# Altium PCB LEO_COTS.PcbDoc
Units mil, origin at the board's own origin, x right, y up, seen from the top; angles counter-clockwise.
Board outline 1417.32 x 393.7 mil, 2 copper layers (Top Layer, Bottom Layer), stack 14.8 mil thick; 19 components, 18 nets, 99 pads, 14 vias.
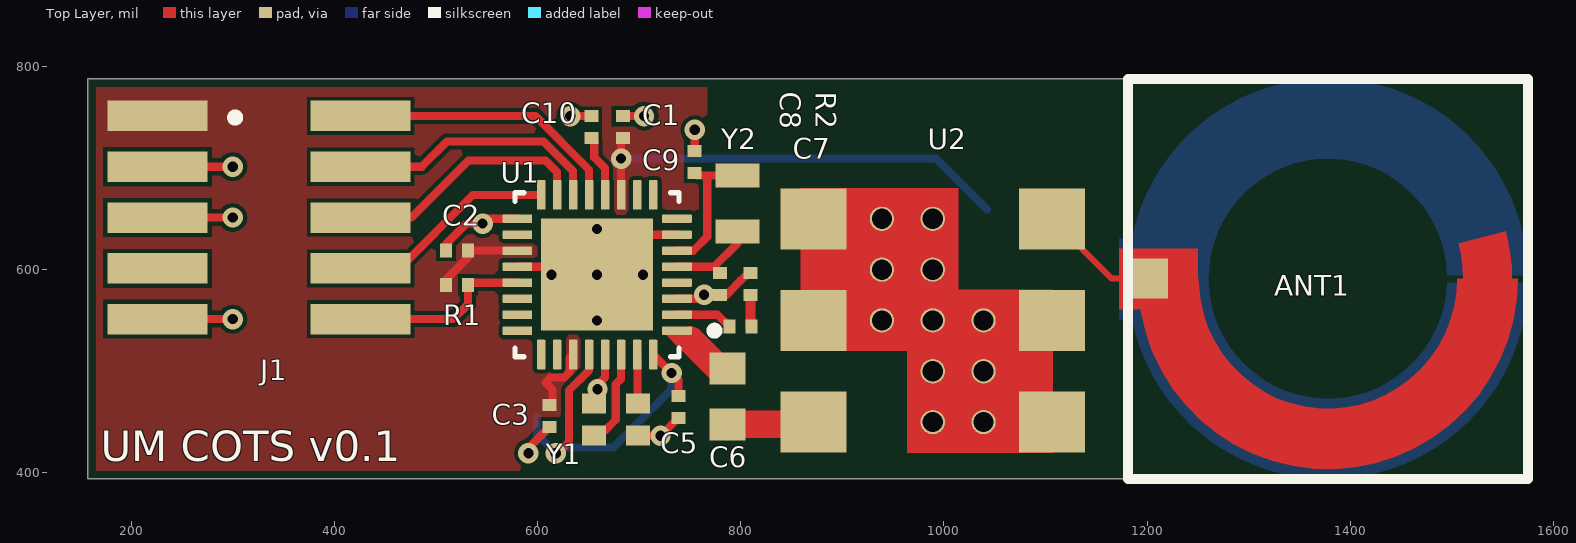
[diagram p0: Top Layer view]
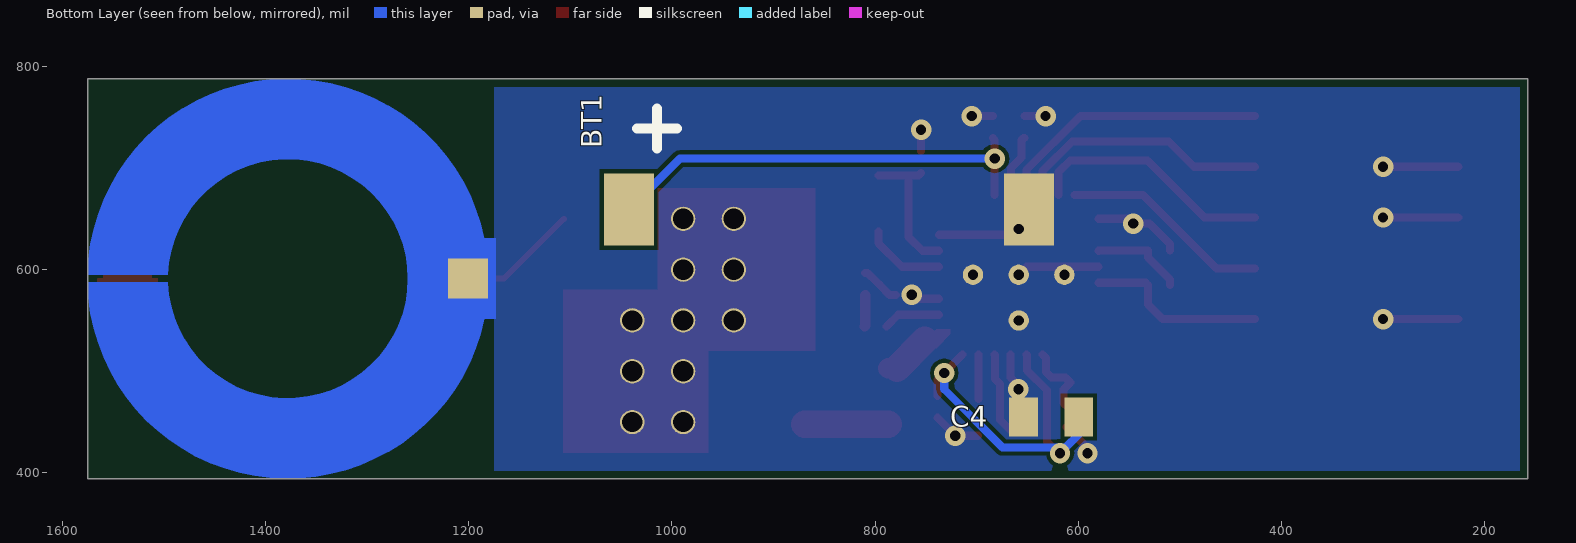
[diagram p1: Bottom Layer view, seen from below]
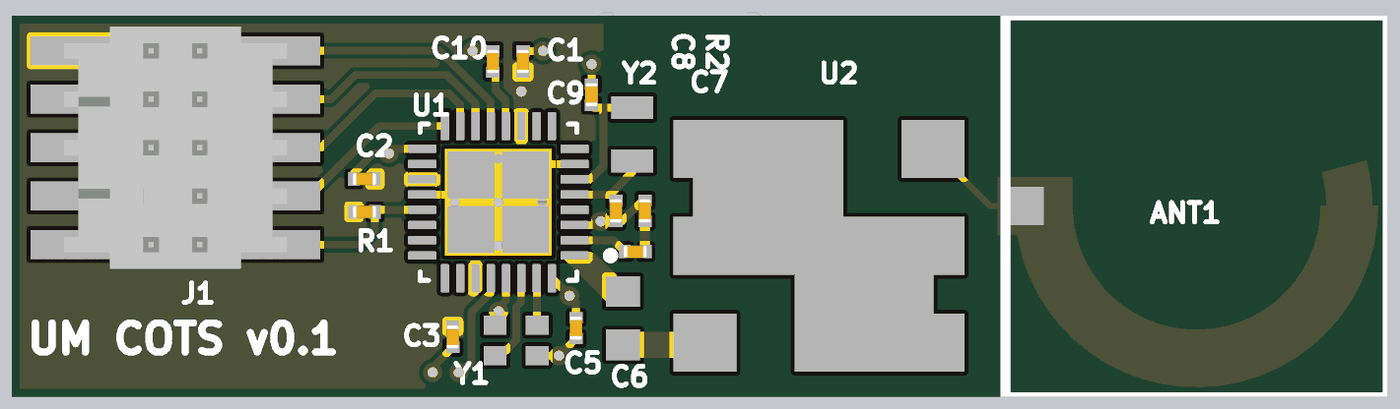
[diagram p2: 3D render of the assembled board from above, using the file's embedded part models]

## Layer stack, top to bottom
Top Solder: solder mask 0.4, Solder Resist, Dk 3.5
Top Layer: signal copper 1.4
Dielectric 1: core 12, RO4003C-012, Dk 3.55
Bottom Layer: signal copper 1.4
Bottom Solder: solder mask 0.4, Solder Resist, Dk 3.5

## Board outline
157.48,393.7 1574.8,393.7 1574.8,787.4 157.48,787.4

## Design rules (kind name [scope] priority, off if disabled: settings)
BoardOutlineClearance BoardOutlineClearance_1 [All] p1: gap=8 ignorepadtopadclearanceinfootprint=FALSE
Clearance [All] p1: gap=4 ignorepadtopadclearanceinfootprint=FALSE
HoleSize [All] p1: absolutevalues=TRUE maxlimit=100 minlimit=8 maxpercent=80.000 minpercent=20.000
MinimumAnnularRing [All] p1: minimumring=8
PlaneConnect [All] p1: planeconnectstyle=Direct reliefexpansion=20 reliefentries=4 reliefconductorwidth=10 reliefairgap=10
PolygonConnect [All] p1: connectstyle=Direct reliefconductorwidth=10 reliefentries=4 polygonreliefangle="90 Angle" airgapwidth=10
RoutingVias [All] p1: holewidth=10 width=20 viastyle="Through Hole" minholewidth=8 minwidth=16 maxholewidth=90 maxwidth=100
SolderMaskExpansion [All] p1: expansion=4
Width [All] p1: maxlimit=100 minlimit=4 preferedwidth=4
28 further rules are at their usual default settings.

## Components (designator, comment, footprint, x,y, rotation, side; value= is the part's Value field where it differs from the comment)
ANT1 "ANT" RESLOOP_OD10_fw15_fl180_sw12_sl15 1377.95,590.83 r180 top
BT1 "BATT" 1318164-1 845.46,658.92 r90 bottom
C1 "CAP_0201" CAPC0603X04N 684,740 r270 top value=100nF
C2 "CAP_0201" CAPC0603X04N 520.7,618.7 r0 top value=100nF
C3 "CAP_0201" CAPC0603X04N 611.7,455.7 r90 top value=100nF
C4 "CAP_0603" CAPC1608X05N 626.7,454.7 r0 bottom value=10uF
C5 "CAP_0201" CAPC0603X04N 738.7,464.7 r90 top value=100nF
C6 "CAP" 1608[0603] 787,475 r270 top value=12pF
C7 "CAP_0201" CAPC0603X04N 799.7,543.7 r180 top value=12pF
C8 "CAP_0201" CAPC0603X04N 779.7,585.7 r90 top value=12pF
C9 "CAP_0201" CAPC0603X04N 754.7,705.7 r270 top value=12pF
C10 "CAP_0201" CAPC0603X04N 653,740 r270 top value=1uF
J1 "10-Pin JTAG" FTSH-105-01-F-DV-007-K 326,651 r0 top
R1 "Res Semi" CAPC0603X04N 520.7,584.7 r180 top value=1K
R2 "Res Semi" CAPC0603X04N 809.7,585.7 r270 top value=50
U1 "CC1350F128RSMR" QFN40P400X400X100-33N 658.7,594.7 r180 top
U2 "RMK-3-332+" RMK-3-331+ 989,549.7 r90 top
Y1 "830108160801" LFXTAL081608 677,452 r180 top
Y2 "ECS-.327-7-12-TR" XTAL_ECS-.327-7-12-TR 796.7,664.7 r90 top

## Footprints (in the part's own frame and the unit in brackets; to place one, negate y for a bottom-side part, rotate by r counter-clockwise, add the part's x,y. Pads: shape width x height; smd on the part's side, far side on the other; paste and mask are expansions set on the pad)
1608[0603] [mm] "Chip Capacitor, Body 1.6x0.8mm, IPC High Density"
  rect 0.8x0.9 smd: 1(-0.7,0) 2(0.7,0)
  body extent -0.87,-0.48 0.87,0.48, height 1.3
1318164-1 [mm] "BATTERY HOLDER COIN 6.8MM SMD"
  rect 1.8x1.25 smd: 1(0,5) 2(0,-5)
  silkscreen extent 1.52,3.8 2.52,4.8, body extent -3.35,-5.2 3.35,5.2, height 2.3
CAPC0603X04N [mm] "Chip Capacitor, 2-Leads, Body 0.60x0.30mm, IPC Medium Density"
  rect 0.3x0.35 smd: 1(-0.275,0) 2(0.275,0)
  body extent -0.32,-0.17 0.32,0.17, height 0.35
CAPC1608X05N [mm] "Chip Capacitor, 2-Leads, Body 1.55x0.85mm, IPC Medium Density"
  rect 0.72x0.98 smd: 1(-0.69,0) 2(0.69,0)
  body extent -0.8,-0.45 0.8,0.45, height 0.5
FTSH-105-01-F-DV-007-K [mil]
  rect 98.43x30 smd: 1(-100,100) 2(100,100) 3(-100,50) 4(100,50) 5(-100,0) 6(100,0) 7(-100,-50) 8(100,-50) 9(-100,-100) 10(100,-100)
  silkscreen extent -28,94 -20,102, body extent -115,-125 115,125, height 240
LFXTAL081608 [mm] "1.6mm x 1.2mm SMD crystal"
  rect 0.6x0.5 smd: 1(-0.55,-0.4) 2(0.55,-0.4) 3(0.55,0.4) 4(-0.55,0.4)
  body extent -0.8,-0.6 0.8,0.6, height 0.4
QFN40P400X400X100-33N [mm]
  rrect25% 0.74x0.22 smd: 1(-1.995,1.4) 2(-1.995,1) 3(-1.995,0.6) 4(-1.995,0.2) 5(-1.995,-0.2) 6(-1.995,-0.6) 7(-1.995,-1) 8(-1.995,-1.4) 17(1.995,-1.4) 18(1.995,-1) 19(1.995,-0.6) 20(1.995,-0.2) 21(1.995,0.2) 22(1.995,0.6) 23(1.995,1) 24(1.995,1.4)
  rrect25% 0.22x0.74 smd: 9(-1.4,-1.995) 10(-1,-1.995) 11(-0.6,-1.995) 12(-0.2,-1.995) 13(0.2,-1.995) 14(0.6,-1.995) 15(1,-1.995) 16(1.4,-1.995) 25(1.4,1.995) 26(1,1.995) 27(0.6,1.995) 28(0.2,1.995) 29(-0.2,1.995) 30(-0.6,1.995) 31(-1,1.995) 32(-1.4,1.995)
  round 0.508 hole 0.254: 33(-1.143,0) 33(0,1.143) 33(0,0) 33(0,-1.143) 33(1.143,0)
  rect 2.8x2.8 smd paste-2: 33(0,0)
  silkscreen extent -3.04,-2.05 2.05,2.05, body extent -2,-2 2,2, height 1
RESLOOP_OD10_fw15_fl180_sw12_sl15 [mm] "Microstrip resonant planar loop"
  rect 1x1 smd mask+0.102: 1(4.5,0)
  rect 1x1 smd far side mask+0.102: 2(4.5,0)
  Top Layer region: -4.75,0 -4.6,0 -4.561,-0.6 -4.443,-1.191 -4.443,-1.191 -3.284,-0.88 -3.371,-0.444 -3.4,0 -3.4,0 -3.25,0 -3.23,0.356 -3.172,0.709 -3.075,1.052 -2.941,1.383 -2.772,1.697 -2.569,1.991 -2.335,2.261 -2.073,2.503 -1.786,2.715 -1.477,2.895 -1.151,3.039 -0.81,3.147 -0.46,3.217 -0.105,3.248 0.252,3.24 0.606,3.193 0.953,3.107 1.288,2.984 1.607,2.825 1.907,2.632 2.184,2.406 2.435,2.152 2.656,1.872 2.846,1.57 3.001,1.248 3.12,0.912 3.208,0.52 3.248,0.12 3.25,0.009 3.25,-0.003 3.25,-0.75 5.2,-0.75 5.2,0.75 4.69,0.75 4.559,1.332 4.386,1.824 4.159,2.294 3.882,2.737 3.559,3.146 3.192,3.517 2.787,3.846 2.349,4.129 1.882,4.361 1.392,4.541 0.886,4.667 0.368,4.736 -0.153,4.748 -0.673,4.702 -1.185,4.6 -1.682,4.442 -2.159,4.231 -2.61,3.969 -3.029,3.659 -3.412,3.304 -3.754,2.91 -4.051,2.481 -4.298,2.021 -4.494,1.538 -4.636,1.036 -4.721,0.521
  Top Layer lines w0.013: 5.2,0.75 5.2,0 5.2,-0.75 3.25,-0.75 3.25,-0.401 3.25,-0.072 3.25,-0.017 3.25,-0.003 3.25,0.009 3.248,0.12 3.208,0.52 3.12,0.912 3.001,1.248 2.846,1.57 2.656,1.872 2.435,2.152 2.184,2.406 1.907,2.632 1.607,2.825 1.288,2.984 0.953,3.107 0.606,3.193 0.252,3.24 -0.105,3.248 -0.46,3.217 -0.81,3.147 -1.151,3.039 -1.477,2.895 -1.786,2.715 -2.073,2.503 -2.335,2.261 -2.569,1.991 -2.772,1.697 -2.941,1.383 -3.075,1.052 -3.172,0.709 -3.23,0.356 -3.25,0 -3.4,0 ccw(c0,0) -3.284,-0.88 -4.443,-1.191 cw(c0,0) -4.6,0 -4.75,0 -4.721,0.521 -4.636,1.036 -4.494,1.538 -4.298,2.021 -4.051,2.481 -3.754,2.91 -3.412,3.304 -3.029,3.659 -2.61,3.969 -2.159,4.231 -1.682,4.442 -1.185,4.6 -0.673,4.702 -0.153,4.748 0.368,4.736 0.886,4.667 1.392,4.541 1.882,4.361 2.349,4.129 2.787,3.846 3.192,3.517 3.559,3.146 3.882,2.737 4.159,2.294 4.386,1.824 4.559,1.332 4.69,0.75 5.2,0.75
  Bottom Layer region: -4.999,-0.1 -2.998,-0.1 -2.555,-1.572 -1.442,-2.631 0.05,-3 1.529,-2.581 2.606,-1.486 3,0 2.606,1.486 1.529,2.581 0.05,3 -1.442,2.631 -2.555,1.572 -2.998,0.1 -2.998,0.1 -4.999,0.1 -4.372,2.427 -2.729,4.189 -0.453,4.979 1.929,4.613 3.862,3.175 4.899,1 4.899,1 5.2,1 5.2,-1 4.899,-1 3.862,-3.175 1.929,-4.613 -0.453,-4.979 -2.729,-4.189 -4.372,-2.427 -4.999,-0.1
  Bottom Layer lines w0.013: 5.2,1 5.2,-1 4.899,-1 cw(c0,0) -4.999,-0.1 -2.998,-0.1 ccw(c0,0) -2.998,0.1 -4.999,0.1 cw(c0,0) 4.899,1 5.2,1
RMK-3-331+ [mil] "MiniCircuits TT12245 case"
  rect 60x65 smd: 1(-100,117.5) 2(0,117.52) 3(100,117.5) 4(100,-117.5) 5(0,-117.5) 6(-100,-117.5)
  round 24 hole 20 mask+4: 3(-100,-50) 3(-100,0) 3(-50,-50) 3(-50,0) 3(0,50) 3(0,0) 3(0,-50) 3(50,0) 3(50,50) 3(100,0) 3(100,50)
  Top Layer region: -130,25 -130,-118.11 30,-118.11 30,-25 130,-25 130,129.92 -30,129.92 -30,25
  body extent -155,-130 155,130, height 160
XTAL_ECS-.327-7-12-TR [mm]
  rect 0.6x1.1 smd: 1(-0.7,0) 2(0.7,0)
  body extent -1,-0.6 1,0.6, height 0.25

## Part data
BT1: Supplier Part Number 1=A108890CT-ND, Supplier 1=Digi-Key
C1 C2 C3 C5 C7 C8 C9 C10: "CAP CER 0201"
C4 C6: "CAP CER 0603"
J1: library part CM10, Supplier Part Number 1=FTSH-105-01-L-DV-007-K-P-ND, Supplier 1=Digi-Key
R1 R2: "Semiconductor Resistor", LatestRevisionDate=17-Jul-2002, LatestRevisionNote="Re-released for DXP Platform.", PackageDescription="Axial Device, Thru-Hole; 2 Leads; 0.5 in Pin Spacing", PackageReference=AXIAL-0.5, Published=8-Jun-2000, Publisher="Altium Limited"
U1: "Ultra-Low-Power Dual-Band Wireless MCU"
U2: "3x Frequency Multiplier"
Y1: "24 MHz crystal", Package=None, Availability=Unavailable, MP=ECS-.327-7-12-TR, Price=None
Y2: "32.768 kHz SMD Crystal", Package=None, Availability=Unavailable, MP=ECS-.327-7-12-TR, Price=None

## Via types
v1: diameter 20, hole 10, Top Layer to Bottom Layer, tented both sides, 14 vias

## Nets (pads, with @x,y where several pads share a name; then routed paths per layer and width w, separated by ;. In a path a pad name is that pad's centre, name@x,y a point inside that pad or via, vN(x,y) a via of type N, cw(c..) or ccw(c..) an arc to the next point about the centre after c; other vN are vias at no path point)
GND: ANT1.2 BT1.2 C1.1 C2.1 C3.1 C4.2 C5.1 C8.1 C9.1 C10.1 J1.3 J1.5 J1.9 R2.1 U1.3 U1.7 U1.17 U1.20 U1.29 U1.33 U2.2 U2.3 U2.5 U2.6 Y1.2 Y1.4 | length 711.5
  Top Layer w8: J1.9 v1(300,551) ; J1.5 v1(300,651) ; J1.3 v1(300,701) ; C2.1 509.87,624.87 530,645 v1(546,645) 550.82,649.82 U1.17 ; U1.20 650.83,602.57 U1.33@658.7,594.7 ; v1(591,419) 591,424.17 C3.1 ; v1(632.17,750.83) C10.1 ; v1@655.35,482.35 666.57,493.57 U1.29 ; U1.33@666.57,634.07 U1.7 ; C1.1 v1(704.83,750.83) ; Y1.4 v1(721.08,436.25) C5.1 ; U1.3 758.08,571.08 762,575 v1(764,575) ; C9.1 v1(754.7,737.35) ; C8.1 785.87,574.87 794.81,583.81 794.81,584.09 799.5,588.78 799.78,588.78 807.53,596.53 R2.1
  other v1: 659,482
JTAG_RSTN: J1.10 R1.1 U1.21 | length 180.2
  Top Layer w8: J1.10 517,551 531.53,565.53 R1.1 533.65,586.83 U1.21
JTAG_TCK: J1.4 U1.14 | length 255.1
  Top Layer w8: J1.4 486,701 511,726 605.93,726 635.08,696.85 U1.14
JTAG_TDI: J1.8 U1.16 | length 207.5
  Top Layer w8: J1.8 464,601 536.24,673.24 U1.16
JTAG_TDO: J1.6 U1.15 | length 243.6
  Top Layer w8: J1.6 476,651 532,707 607.96,707 619.33,695.62 U1.15
JTAG_TMS: J1.2 U1.13 | length 271.6
  Top Layer w8: J1.2 597.9,751 650.83,698.07 U1.13
NetANT1_1: ANT1.1 U2.4 | length 118.7
  Top Layer w6: U2.4 1165.37,590.83 1173.23,590.83 ANT1.1
NetC4_1: C4.1 C5.2 U1.28 U1.32 | length 358.6
  Top Layer w8: v1(618,419) 619,418 631,430 631,481 650.5,500.5 650.5,515.83 U1.28 ; U1.32 v1(731.99,497.99) 738.7,491.28 C5.2
  Bottom Layer w8: C4.1 599.54,437.46 612.5,424.5 674.5,424.5 731.99,481.99 v1(731.99,497.99)
NetC6_1: C6.1 U1.1 | length 47.4
  Top Layer w20: C6.1@778.44,502.56 C6.1
  Top Layer w27: 751,530 C6.1@778.44,502.56
NetC6_2: C6.2 U2.1 | length 85.4
  Top Layer w6: U2.1@869.24,447.44 U2.1
  Top Layer w27: C6.2 U2.1@869.24,447.44
NetC7_1: C7.1 R2.2 | length 31.5
  Top Layer w10: R2.2 809.7,544.53 C7.1
NetC7_2: C7.2 U1.2 | length 56.4
  Top Layer w8: U1.2 777.24,555.33 C7.2
NetC8_2: C8.2 U1.5 Y2.1 | length 80.5
  Top Layer w8: U1.5 773.65,602.57 796.7,625.62 Y2.1
NetC9_2: C9.2 U1.6 Y2.2 | length 138.8
  Top Layer w8: U1.6 753.32,618.32 767,632 767,692.26 ; C9.2 757.31,692.26 767,692.26 ; Y2.2 767,692.26
NetC10_2: C10.2 U1.12 | length 62.1
  Top Layer w8: C10.2 653.98,729.17 655.89,727.27 655.89,709.98 666.24,699.62 666.24,673.57 U1.12
NetU1_30: U1.30 Y1.3 | length 92.9
  Top Layer w8: Y1.3@655.05,440.95 665.95,440.95 677,452 677,487.03 681.99,492.02 681.99,515.83 U1.30
NetU1_31: U1.31 Y1.1 | length 43.8
  Top Layer w8: U1.31 698.35,515.87 Y1.1@698.35,472.45
VDDS: BT1.1 C1.2 C2.2 C3.2 J1.1 R1.2 U1.11 U1.19 U1.27 | length 602.8
  Top Layer w8: R1.2 509.87,589.87 531.53,611.53 C2.2 579.78,618.7 U1.19 ; C3.2 612.69,466.53 614.59,468.43 614.59,481.84 607.68,488.75 612.51,493.59 626.34,493.59 631.66,498.91 631.66,512.74 U1.27 ; U1.11 v1(682.32,709) 682.32,727.5 C1.2
  Bottom Layer w8: v1(682.32,709) 992.23,709 BT1.1
pads on no net: J1.7 U1.4 U1.8 U1.9 U1.10 U1.18 U1.22 U1.23 U1.24 U1.25 U1.26

## Polygon pours and split planes (outlines as drawn)
GND on Bottom Layer (solid, pour order 2): 1175,393.7 1175,787 157.48,787.4 157.48,394
VDDS on Top Layer (solid, pour order 6): 693,394 693,558 767,632 767,787.4 157,787.4 157,394

## Other copper
Top Layer:
  region net NetC6_1: 740,522 726,536 726,541 740,541 751,530

## Silkscreen, mask and mechanical layers (free items; w line width, h text height)
Top Overlay:
  lines w10: 1181.1,393.7 1574.8,393.7 1574.8,787.4 1181.1,787.4 1181.1,393.7
  text "UM COTS v0.1" at 170,411 h30
Mechanical 5 (Mech5):
  the board outline again, w10